# Altium PCB PCB_TLK.PcbDoc
Units mm, origin at the board's own origin, x right, y up, seen from the top; angles counter-clockwise.
Board outline 64.4 x 71.8 mm, 2 copper layers (Top Layer, Bottom Layer); 53 components, 42 nets, 284 pads, 78 vias.
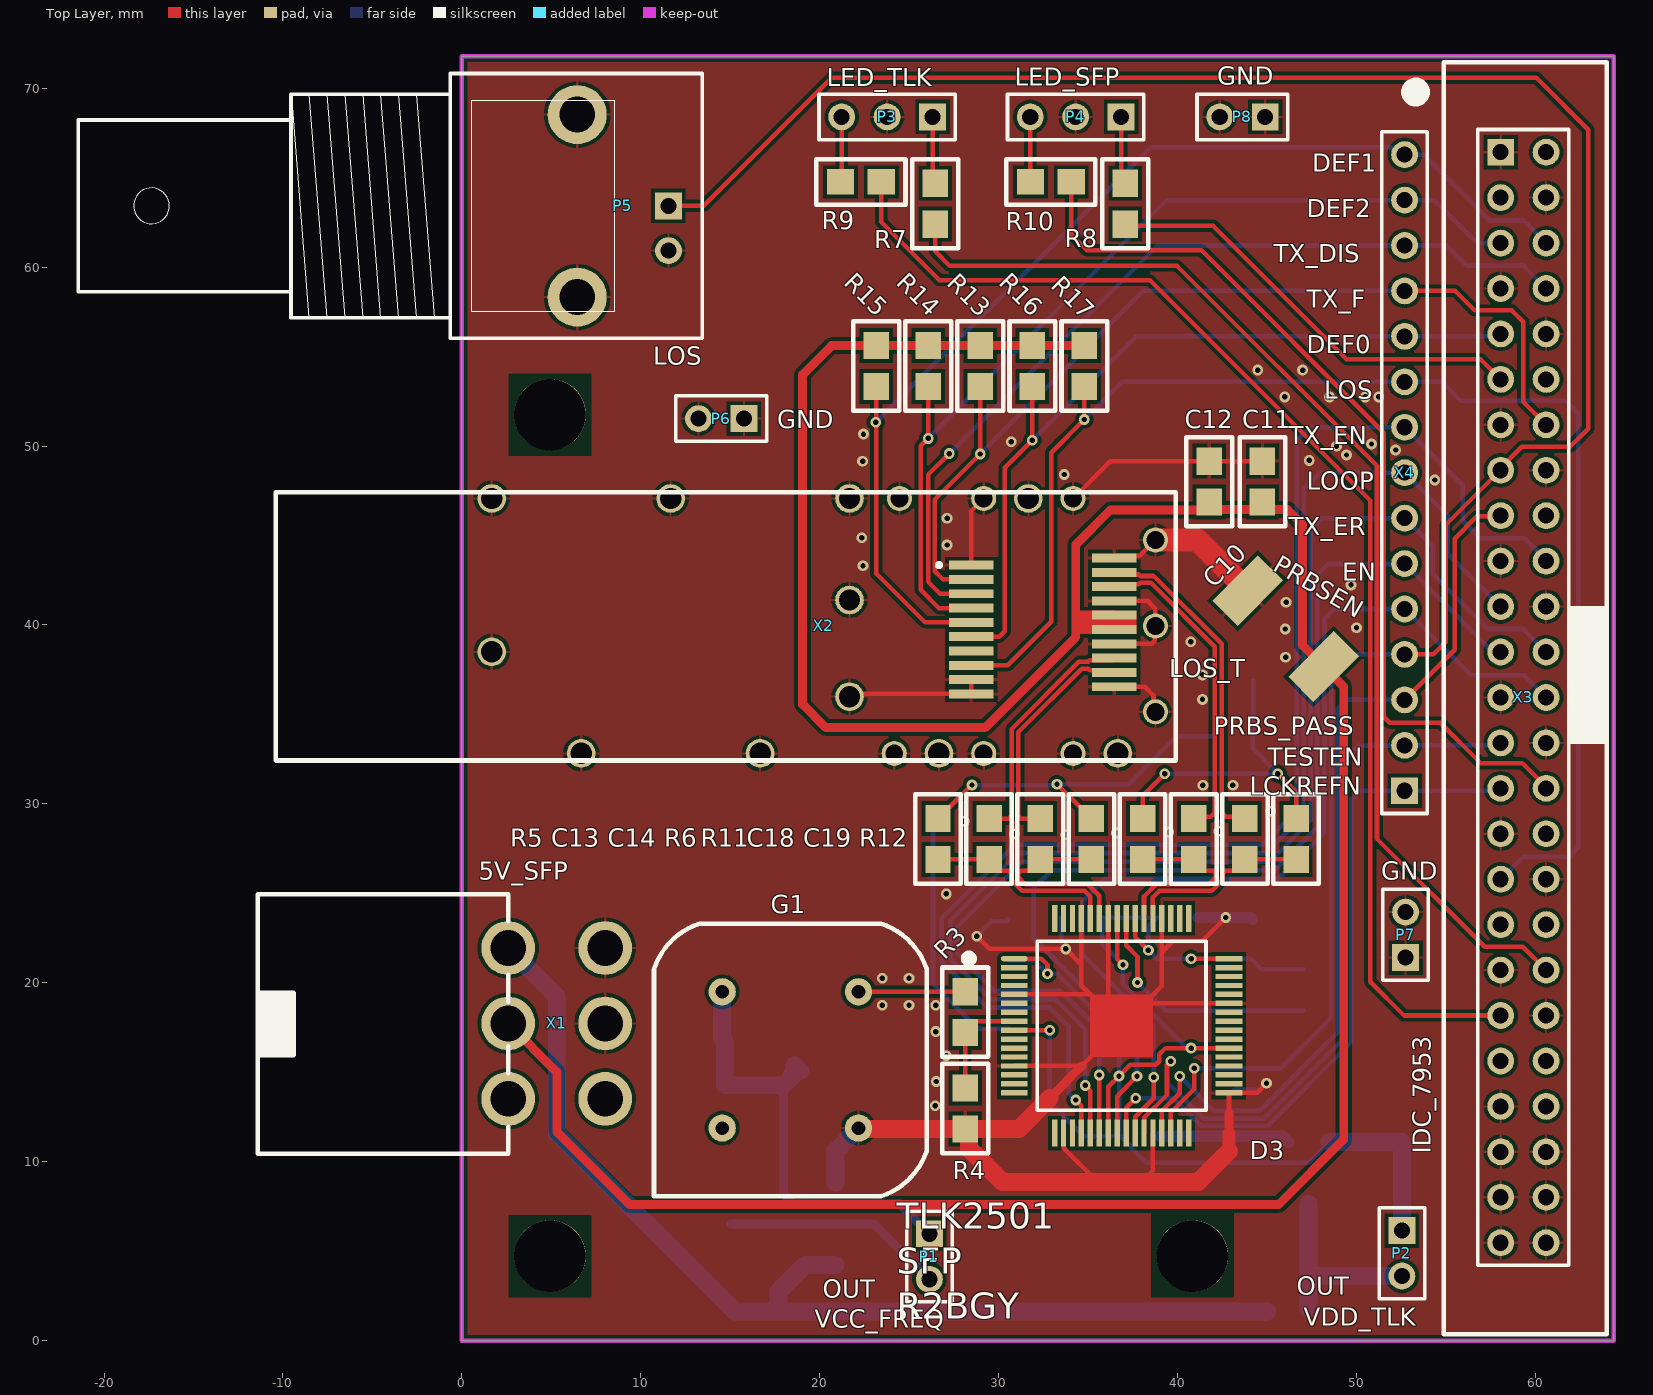
[diagram p0: Top Layer view]
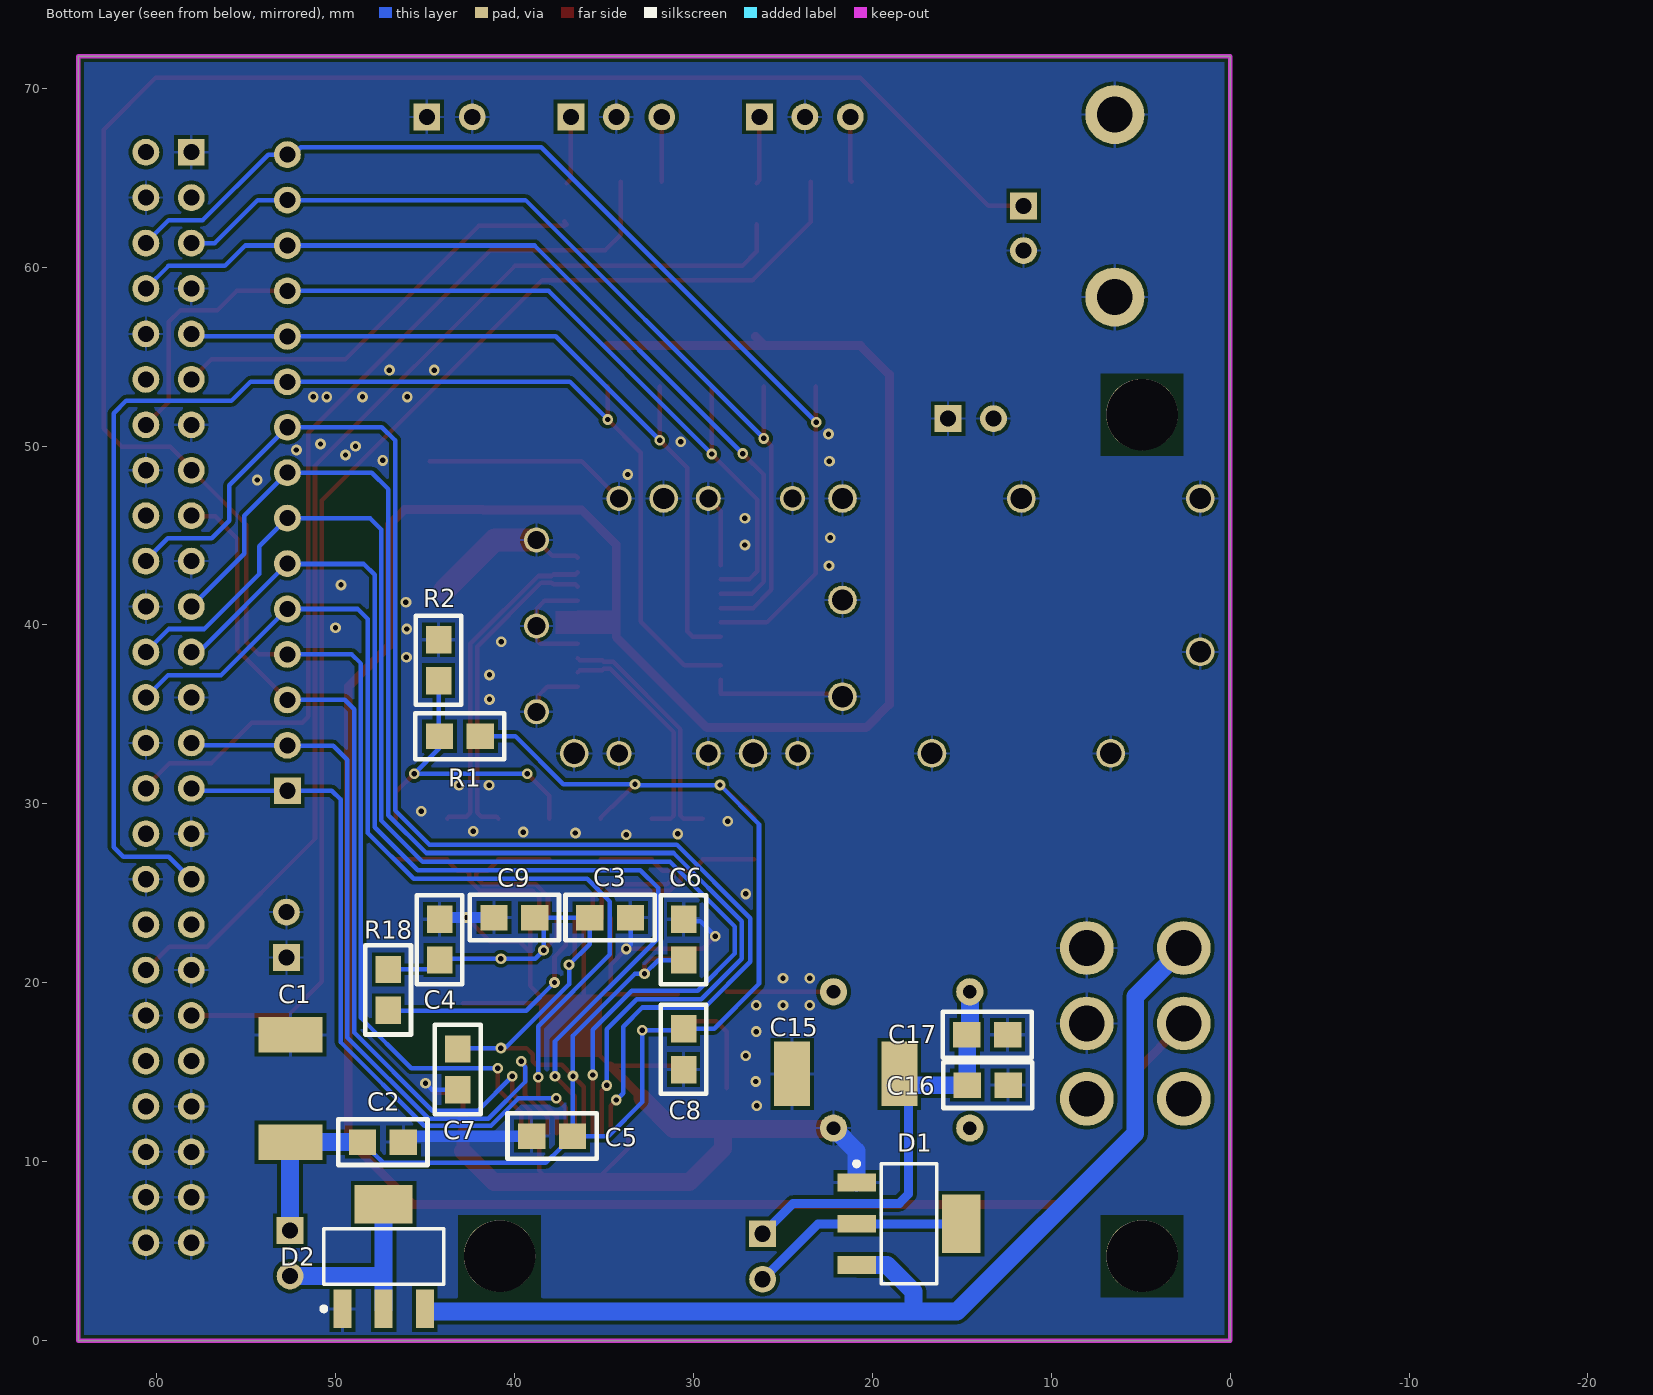
[diagram p1: Bottom Layer view, seen from below]

## Layer stack, top to bottom
Top Solder: solder mask 0.0102, Solder Resist, Dk 3.5
Top Layer: signal copper 0.0356
Dielectric 1: dielectric 0.32, FR-4, Dk 4.8
Bottom Layer: signal copper 0.0356
Bottom Solder: solder mask 0.0102, Solder Resist, Dk 3.5

## Board outline
0,0 0,71.8 64.4,71.8 64.4,0

## Design rules (kind name [scope] priority, off if disabled: settings)
BoardOutlineClearance [OnLayer('Multi-Layer')] p1: gap=0.254 ignorepadtopadclearanceinfootprint=FALSE except(0: Arc-SplitContinuation Track-SplitContinuation SMDPad-SplitContinuation THPad-SplitContinuation Via-SplitContinuation Fill-SplitContinuation Poly-SplitContinuation Region-SplitContinuation Text-SplitContinuation; 0.4: Arc-OutlineEdge Track-OutlineEdge SMDPad-OutlineEdge THPad-OutlineEdge Via-OutlineEdge Fill-OutlineEdge Poly-OutlineEdge Region-OutlineEdge Text-OutlineEdge)
Clearance [All] p1: gap=0.125 ignorepadtopadclearanceinfootprint=FALSE except(0.2: Arc-Fill Arc-Poly Track-Fill Track-Poly SMDPad-SMDPad SMDPad-Fill SMDPad-Poly THPad-Fill THPad-Poly Via-Fill Via-Poly Fill-Fill Fill-Poly Poly-Poly Poly-Region Poly-Text; 0.25: Arc-Hole Track-Hole SMDPad-Hole THPad-Hole Via-Hole Fill-Hole Poly-Hole Region-Hole Text-Hole) // Standart
DiffPairsRouting [All] p1: maxlimit=0.254 minlimit=0.127 mostfreqgap=0.13 toplayer_minwidth=0.127 toplayer_maxwidth=0.381 toplayer_prefwidth=0.37 bottomlayer_minwidth=0.127 bottomlayer_maxwidth=0.381 bottomlayer_prefwidth=0.37 maxuncoupledlength=12.7
HoleSize [All] p1: absolutevalues=TRUE maxlimit=5 minlimit=0.3 maxpercent=80.000 minpercent=20.000
MinimumSolderMaskSliver [All] p1: minsoldermaskwidth=0.1
PlaneClearance "PlaneClearance-1 1/2 Oz" [All] p1: clearance=0.2 // Standart
PlaneConnect "TermalConnect-1 1/2 Oz" [All] p1: planeconnectstyle=Relief reliefexpansion=0.2 reliefentries=4 reliefconductorwidth=0.2 reliefairgap=0.2 // Standart
PolygonConnect "PolygonConnect-1 1/2 Oz" [All] p1: thpad.connectstyle=Relief thpad.reliefconductorwidth=0.15 thpad.reliefentries=4 thpad.polygonreliefangle="90 Angle" thpad.airgapwidth=0.2 smdpad.connectstyle=Relief smdpad.reliefconductorwidth=0.2 smdpad.reliefentries=4 smdpad.polygonreliefangle="90 Angle" smdpad.airgapwidth=0.2 via.connectstyle=Direct via.reliefconductorwidth=0.254 via.reliefentries=4 via.polygonreliefangle="90 Angle" via.airgapwidth=0.254 // Standart
RoutingVias [All] p1: holewidth=0.3 width=1.27 viastyle="Through Hole" minholewidth=0.3 minwidth=0.6 maxholewidth=0.711 maxwidth=1.27
SilkToSilkClearance [All] p1: silktosilkclearance=0
SilkToSolderMaskClearance [IsPad] p1: minsilkscreentomaskgap=0 clearancetoexposedcopper=TRUE
SolderMaskExpansion [All] p1: expansion=0.102 istentingtop=FALSE
UnRoutedNet [All] p1: checkbadconnections=TRUE
Width [All] p1: maxlimit=2.5 minlimit=0.125 preferedwidth=0.37
22 further rules are at their usual default settings.

## Classes and differential pairs
component class Sheet1_TLK: C1 C2 C3 C4 C5 C6 C7 C8 C9 C10 C11 C12 C13 C14 C15 C16 C17 C18 C19 D1 D2 D3 G1 P5 P7 P8 R1 R2 R3 R4 R5 R6 R7 R8 R9 R10 R13 R14 R15 R16 R17 R18 X1 X2 X3 X4
differential pair TX: +TX_P -TX_N
differential pair TD: +TD_P -TD_N
differential pair RX: +RX_P -RX_N
differential pair RD: +RD_P -RD_N

## Components (designator, comment, footprint, x,y, rotation, side; value= is the part's Value field where it differs from the comment)
C1 "10 мкФ" Cap_BIG 54.431,9.997 r180 bottom
C2 "0,1 мкФ" CAP_SMALL 44.855,12.359 r0 bottom
C3 "0,01 мкФ" CAP_SMALL 32.156,24.917 r0 bottom
C4 "0,01 мкФ" CAP_SMALL 45.466,24.917 r270 bottom
C5 "0,01 мкФ" CAP_SMALL 40.411,10.16 r180 bottom
C6 "0,01 мкФ" CAP_SMALL 31.825,24.917 r270 bottom
C7 "0,01 мкФ" CAP_SMALL 41.91,12.649 r90 bottom
C8 "0,01 мкФ" CAP_SMALL 29.285,13.781 r90 bottom
C9 "0,01 мкФ" CAP_SMALL 42.52,22.377 r180 bottom
C10 "10 мкФ" Cap_BIG 47.6,35.56 r45 top
C11 "0,1 мкФ" CAP_SMALL 43.485,50.521 r270 top
C12 "0,01 мкФ" CAP_SMALL 40.513,50.521 r270 top
C13 "0,01 мкФ" CAP_SMALL 30.747,25.531 r90 top
C14 "0,01 мкФ" CAP_SMALL 33.606,25.531 r90 top
C15 "10 мкФ" Cap_BIG 17.399,13.005 r90 bottom
C16 "0,1 мкФ" CAP_SMALL 11.049,15.545 r0 bottom
C17 "0,01 мкФ" CAP_SMALL 11.074,18.364 r0 bottom
C18 "0,01 мкФ" CAP_SMALL 42.184,25.531 r90 top
C19 "0,01 мкФ" CAP_SMALL 45.044,25.531 r90 top
D1 "LM1117GS-3.3" LM1117_SOT223 17.958,6.528 r180 bottom
D2 "LM1117GS-2.5" LM1117_SOT223 47.32,4.699 r90 bottom
D3 "TLK2501IRCP" Quad64 30.885,21.35 r270 top
G1 "125 МГц Shoulder El." HALF 14.553,11.876 r90 top
P1 "VCC_FREQ" HDR1X2 26.137,5.969 r270 top
P2 "VDD_TLK" HDR1X2 52.553,6.147 r270 top
P3 "LED_TLK" HDR1X3 26.314,68.402 r180 top
P4 "LED_SFP" HDR1X3 36.855,68.402 r180 top
P5 "LOS" "BNC_RA CON" 11.552,63.429 r0 top
P6 "GND" HDR1X2 15.773,51.537 r180 top
P7 "GND" HDR1X2 52.756,21.412 r90 top
P8 "GND" HDR1X2 44.907,68.402 r180 top
R1 "200" RES 45.542,35.027 r270 bottom
R2 "810" RES 43.002,40.513 r0 bottom
R3 "50" RES 29.386,20.842 r180 top
R4 "4,7к" RES 29.386,15.458 r180 top
R5 "50" RES 25.373,25.556 r0 top
R6 "50" RES 36.44,30.52 r180 top
R7 "50" RES 25.222,61.07 r0 top
R8 "50" RES 35.839,61.07 r0 top
R9 "50" RES 24.79,63.525 r90 top
R10 "50" RES 35.408,63.525 r90 top
R11 "50" RES 36.81,25.556 r0 top
R12 "50" RES 47.877,30.52 r180 top
R13 "10к" RES 27.737,51.994 r0 top
R14 "10к" RES 24.828,51.994 r0 top
R15 "10к" RES 21.92,51.994 r0 top
R16 "10к" RES 30.645,51.994 r0 top
R17 "10к" RES 33.553,51.994 r0 top
R18 "200" RES 48.311,17.12 r180 bottom
X1 "5V_SFP" POWER 2.591,21.947 r90 top
X2 "SFP-20pin" SFP-20pin 28.472,43.347 r270 top
X3 "IDC_7953" IDC_7953 58.072,66.43 r270 top
X4 "Header 15" HDR1X15 52.705,30.734 r90 top

## Footprints (in the part's own frame and the unit in brackets; to place one, negate y for a bottom-side part, rotate by r counter-clockwise, add the part's x,y. Pads: shape width x height; smd on the part's side, far side on the other; paste and mask are expansions set on the pad)
"BNC_RA CON" [mm] "Connector; BNC Elbow"
  rect 1.5x1.5 hole 0.9: 1(0,0)
  round 3.3 hole 2: 2(-5.1,-5.1) 2(-5.1,5.1)
  round 1.5 hole 0.9: 2(0,-2.5)
  silkscreen extent -33,-7.4 1.9,7.4
Cap_BIG [mm] "FROM_MAX"
  rect 3.6x2 smd: 1(1.905,7.092) 2(1.905,1.092)
  body extent 0,-0.01 3.81,8.19, height 2.54
CAP_SMALL [mil] "FROM_MAX"
  rect 60x55.98 smd: 1(53.71,50) 2(143.71,50)
  silkscreen extent 1,0 197,100, body extent 20,18 178,82, height 100
HALF [mil]
  round 60 hole 30: 1(0,0) 4(0,-300) 5(300,-300) 8(300,0)
  silkscreen extent -150,-450 450,150, body extent -100,-350 396,98, height 276
HDR1X2 [mm] "Connector; Header; 2 Position"
  rect 1.5x1.5 hole 0.9: 1(0,0)
  round 1.5 hole 0.9: 2(2.54,0)
  silkscreen extent -1.27,-1.27 3.81,1.27
HDR1X3 [mm] "Connector; Header; 3 Position"
  rect 1.5x1.5 hole 0.9: 1(0,0)
  round 1.5 hole 0.9: 2(2.54,0) 3(5.08,0)
  silkscreen extent -1.27,-1.27 6.35,1.27
HDR1X15 [mm] "Connector; Header; 15 Position"
  rect 1.5x1.5 hole 0.9: 1(0,0)
  round 1.5 hole 0.9: 2(2.54,0) 3(5.08,0) 4(7.62,0) 5(10.16,0) 6(12.7,0) 7(15.24,0) 8(17.78,0) 9(20.32,0) 10(22.86,0) 11(25.4,0) 12(27.94,0) 13(30.48,0) 14(33.02,0) 15(35.56,0)
  silkscreen extent -1.27,-1.27 36.83,1.27
IDC_7953 [mm]
  rect 1.5x1.5 hole 0.9: 1(0,0)
  round 1.5 hole 0.9: 2(0,2.54) 3(2.54,0) 4(2.54,2.54) 5(5.08,0) 6(5.08,2.54) 7(7.62,0) 8(7.62,2.54) 9(10.16,0) 10(10.16,2.54) 11(12.7,0) 12(12.7,2.54) 13(15.24,0) 14(15.24,2.54) 15(17.78,0) 16(17.78,2.54) 17(20.32,0) 18(20.32,2.54) 19(22.86,0) 20(22.86,2.54) 21(25.4,0) 22(25.4,2.54) 23(27.94,0) 24(27.94,2.54) 25(30.48,0) 26(30.48,2.54) 27(33.02,0) 28(33.02,2.54) 29(35.56,0) 30(35.56,2.54) 31(38.1,0) 32(38.1,2.54) 33(40.64,0) 34(40.64,2.54) 35(43.18,0) 36(43.18,2.54) 37(45.72,0) 38(45.72,2.54) 39(48.26,0) 40(48.26,2.54) 41(50.8,0) 42(50.8,2.54) 43(53.34,0) 44(53.34,2.54) 45(55.88,0) 46(55.88,2.54) 47(58.42,0) 48(58.42,2.54) 49(60.96,0) 50(60.96,2.54)
  silkscreen extent -5.03,-5.14 66.07,5.92
LM1117_SOT223 [mm] "SOT223, 4-Leads, Body 6,50x7,00mm (avg), Pitch 2,30mm, IPC Medium Density"
  rect 2.15x1 smd: 1(-2.925,2.3) 2(-2.925,0) 3(-2.925,-2.3)
  rect 2.15x3.25 smd: 4(2.925,0)
  silkscreen extent -3.05,-3.35 1.55,3.47, body extent -1.85,-3.35 1.85,3.35, height 1.8
POWER [mm] "POWER"
  round 3 hole 2: 1(0,0) 2(-4.217,0) 3(-8.435,0) 4(-8.435,-5.422) 5(-4.217,-5.422) 6(0,-5.422)
  silkscreen extent -11.5,0 3,14
Quad64 [mm]
  oval 0.3x1.5 smd: 1(0,0)
  rect 0.3x1.5 smd: 2(0.5,0) 3(1,0) 4(1.5,0) 5(2,0) 6(2.5,0) 7(3,0) 8(3.5,0) 9(4,0) 10(4.5,0) 11(5,0) 12(5.5,0) 13(6,0) 14(6.5,0) 15(7,0) 16(7.5,0) 33(7.5,12) 34(7,12) 35(6.5,12) 36(6,12) 37(5.5,12) 38(5,12) 39(4.5,12) 40(4,12) 41(3.5,12) 42(3,12) 43(2.5,12) 44(2,12) 45(1.5,12) 46(1,12) 47(0.5,12) 48(0,12)
  rect 1.5x0.3 smd: 17(9.75,2.25) 18(9.75,2.75) 19(9.75,3.25) 20(9.75,3.75) 21(9.75,4.25) 22(9.75,4.75) 23(9.75,5.25) 24(9.75,5.75) 25(9.75,6.25) 26(9.75,6.75) 27(9.75,7.25) 28(9.75,7.75) 29(9.75,8.25) 30(9.75,8.75) 31(9.75,9.25) 32(9.75,9.75) 49(-2.25,9.75) 50(-2.25,9.25) 51(-2.25,8.75) 52(-2.25,8.25) 53(-2.25,7.75) 54(-2.25,7.25) 55(-2.25,6.75) 56(-2.25,6.25) 57(-2.25,5.75) 58(-2.25,5.25) 59(-2.25,4.75) 60(-2.25,4.25) 61(-2.25,3.75) 62(-2.25,3.25) 63(-2.25,2.75) 64(-2.25,2.25)
  silkscreen extent -0.97,-2.74 8.46,10.71, body extent -0.96,1.29 8.46,10.71, height 1
RES [mil] "FROM_MAX"
  rect 55.98x60 smd: 1(49,52.71) 2(49,142.71)
  silkscreen extent -1,0 99,196, body extent 17,19 81,177, height 100
SFP-20pin [mm] "SFP-20pin"
  rect 0.5x2.5 smd: 1(0,0) 2(0.8,0) 3(1.6,0) 4(2.4,0) 5(3.2,0) 6(4,0) 7(4.8,0) 8(5.6,0) 9(6.4,0) 10(7.2,0) 11(6.8,8) 12(6,8) 13(5.2,8) 14(4.4,8) 15(3.6,8) 16(2.8,8) 17(2,8) 18(1.2,8) 19(0.4,8) 20(-0.4,8)
  round 1.6 hole 1.2: h(-3.725,3.2) h(-3.725,-6.8) h(-3.725,-16.8) h(-3.725,-26.8) h(1.95,-6.8) h(4.85,-26.8) h(7.35,-6.8) h(10.525,8.2) h(10.525,-1.8) h(10.525,-11.8) h(10.525,-21.8)
  round 1.4 hole 1: h(-3.725,5.7) h(-3.725,0.7) h(-3.725,-4) h(-1.4,10.3) h(3.4,10.3) h(8.2,10.3) h(10.525,5.7) h(10.525,0.7) h(10.525,-4.3)
  silkscreen extent -4.06,-38.86 10.92,11.43, body extent -4.1,-38.86 10.9,7.8, height 9

## Part data
C1 C10 C15: library part CAP_BIG
C2 C3 C4 C5 C6 C7 C8 C9 C11 C12 C13 C14 C16 C17 C18 C19: library part CAP_SMALL
D1: "Стабилизатор напряжения 3,3В"
D2: "Стабилизатор напряжения 2,5В"
P1 P2 P6 P7 P8: library part "Header 2", "Header, 2-Pin", LatestRevisionDate=17-Jul-2002, LatestRevisionNote="Re-released for DXP Platform.", Publisher="Altium Limited"
P3 P4: library part "Header 3", "Header, 3-Pin", LatestRevisionDate=17-Jul-2002, LatestRevisionNote="Re-released for DXP Platform.", Publisher="Altium Limited"
P5: library part BNC, "BNC Elbow Connector", LatestRevisionDate=17-Jul-2002, LatestRevisionNote="Re-released for DXP Platform.", Publisher="Altium Limited"
R1 R2 R3 R4 R5 R6 R7 R8 R9 R10 R11 R12 R13 R14 R15 R16 R17 R18: library part RES
X1: library part POWER
X4: "Header, 15-Pin", LatestRevisionDate=17-Jul-2002, LatestRevisionNote="Re-released for DXP Platform.", Publisher="Altium Limited"

## Free pads (board coordinates)
  round 4 hole 4 unplated: 2(4.928,4.724) 2(4.928,51.765) 2(40.843,4.724)

## Via types
v1: diameter 0.6, hole 0.3, Top Layer to Bottom Layer, 78 vias

## Nets (pads, with @x,y where several pads share a name; then routed paths per layer and width w, separated by ;. In a path a pad name is that pad's centre, name@x,y a point inside that pad or via, vN(x,y) a via of type N, cw(c..) or ccw(c..) an arc to the next point about the centre after c; other vN are vias at no path point)
5В: D1.3 D2.3 X1.1 | length 60.2
  Bottom Layer w1: X1.1 5.309,19.229 5.309,11.582 15.265,1.626 17.704,1.626 ; D1.3 19.188,4.228 17.704,2.743 17.704,1.626 ; D2.3@45.02,1.626 17.704,1.626
CLK: D3.8 R3.2 R4.1 | length 6.1
  Top Layer w0.254: R4.1 R3.2 28.142,17.266 28.726,17.85 D3.8
DEF0: R16.1 X2.6 X3.9 X4.11 | length 44.9
  Top Layer w0.254: X2.6 30.05,39.347 30.353,39.649 30.353,48.793 v1(31.89,50.33) R16.1
  Bottom Layer w0.254: v1(31.89,50.33) 37.694,56.134 X4.11 X3.9@58.072,56.134
DEF1: R15.1 X2.5 X3.6 X4.15 | length 62.9
  Top Layer w0.254: R15.1 23.165,42.875 25.893,40.147 X2.5
  Bottom Layer w0.254: v1(23.139,51.333) 38.506,66.7 51.961,66.7 52.368,66.294 53.772,66.294 57.429,62.636 59.326,62.636 X3.6
DEF2: R14.1 X2.4 X3.5 X4.14 | length 53.3
  Top Layer w0.254: R14.1 v1(26.073,50.432) 25.654,50.013 25.654,41.961 26.668,40.947 X2.4
  Bottom Layer w0.254: v1(26.073,50.432) 39.395,63.754 54.356,63.754 56.76,61.35 X3.5
ENABLE: D3.24 X3.23 X4.6 | length 60.4
  Top Layer w0.254: D3.24 36.635,13.664 v1(37.743,14.772)
  Bottom Layer w0.254: v1(37.743,14.772) 37.743,16.728 31.979,22.492 31.979,25.298 32.969,26.289 45.415,26.289 47.828,28.702 47.828,42.799 48.438,43.409 X4.6@52.705,43.409 ; X4.6 57.411,38.728 57.834,38.728 X3.23
GND: C1.1 C2.1 C3.1 C4.1 C5.1 C6.1 C7.1 C8.1 C9.1 C10.1 C11.1 C12.1 C15.1 C16.1 C17.1 D1.1 D2.1 D3.5 D3.13 D3.18 D3.28 D3.33 D3.43 D3.52 D3.58 D3.61 G1.4 P3.2 P4.2 P5.2 P6.1 P6.2 P7.1 P7.2 P8.1 P8.2 R2.1 R4.2 X1.5 X1.6 X2.1 X2.9 X2.10 X2.11 X2.14 X2.17 X2.20 X2.h X3.1 X3.4 X3.7 X3.10 X3.13 X3.16 X3.19 X3.22 X3.25 X3.28 X3.31 X3.34 X3.37 X3.40 X3.43 X3.45 X3.46 X3.47 X3.48 X3.49 X3.50 | length 152.4
  Top Layer w0.254: X2.h@21.672,35.997 21.822,36.147 X2.10 X2.9 ; G1.4 28.098,11.876 R4.2 ; X2.1 28.472,46.372 X2.h@29.172,47.072 ; v1(28.778,22.606) 29.489,21.895 v1(33.757,21.895) 34.635,21.017 ; D3.13 34.664,15.35 35.254,15.94 35.254,15.971 35.375,16.093 35.406,16.093 ; D3.5 35.12,19.35 ; D3.18 33.658,11.577 33.658,10.754 35.547,8.865 ; X2.h@34.172,47.072 36.256,49.156 C12.1 C11.1 ; D3.61 34.635,21.017 ; 36.016,18.455 35.254,19.217 35.12,19.35 ; D3.58 36.135,18.513 36.27,18.379 ; X2.11 38.18,36.547 38.666,36.061 38.666,35.253 X2.h@38.772,35.147 ; X2.14 38.566,38.947 38.735,39.116 38.735,39.91 38.772,39.947 38.772,40.908 38.333,41.347 X2.17 ; X2.20 36.587,43.862 37.887,43.862 X2.h@38.772,44.747 ; 37.794,18.81 37.794,18.785 37.859,18.85 D3.43 ; 37.997,8.865 38.635,9.503 D3.28 ; 38.352,19.039 38.352,19.07 38.5,19.217 38.53,19.217 39.135,19.821 39.135,21.711 ; D3.52 39.135,21.711 ; v1(42.697,23.647) 41.377,22.327 39.75,22.327 39.135,21.711 ; 42.885,12.704 D3.33 44.457,13.85 v1(44.983,14.376) ; 34.635,21.017 34.635,19.836 35.12,19.35
  Top Layer w0.5: 32.866,13.553 34.664,15.35 ; 42.885,11.557 42.885,12.704
  Top Layer w0.75: 42.885,10.582 42.885,11.557
  Top Layer w1: G1.4 22.216,11.833 R4.2 ; 32.866,13.553 31.146,11.833 R4.2 ; 42.885,10.582 41.167,8.865 37.997,8.865 35.547,8.865 30.226,8.865 28.353,10.738 28.353,11.622 R4.2
  Top Layer w1.27: X2.h@38.772,44.747 41.107,44.747 C10.1
  Bottom Layer w0.254: v1(28.778,22.606) 29.611,23.439 30.441,23.439 C6.1 ; C3.1 33.521,22.131 v1(33.757,21.895) ; C7.1 44.62,14.013 v1(44.983,14.376)
  Bottom Layer w0.635: C5.1 45.878,11.43 C2.1 ; C9.1 v1(42.697,23.647) 44.102,23.647 C4.1
  Bottom Layer w1: D1.1 20.883,10.586 G1.4
  other v1: 26.467,13.132 26.518,14.478 27.076,15.926 26.492,17.272 23.5,18.75 25,18.75 26.5,18.75 23.5,20.25 25,20.25 27.076,24.968 33.757,28.27 30.886,28.321 36.601,28.372 39.522,28.423 42.316,28.473 28.092,29.032 45.212,29.591 41.427,31.039 43.104,31.039 41.402,35.839 41.402,37.211 46.05,38.202 40.742,39.065 46.025,39.776 50.013,39.853 46.076,41.275 49.708,42.24 22.428,43.307 27.127,44.475 22.352,44.882 27.127,45.974 54.381,48.108 33.68,48.412 22.403,49.149 47.371,49.2 49.454,49.505 52.197,49.784 48.895,49.987 50.851,50.114 30.709,50.241 22.454,50.673 46,52.75 48.5,52.75 50.5,52.75 51.25,52.75 44.5,54.25 47,54.25
GREEN_SFP: P4.1 R8.2 | length 3.8
  Top Layer w0.254: P4.1 36.855,64.924 R8.2
GREEN_TLK: P3.1 R7.2 | length 3.8
  Top Layer w0.254: P3.1 26.314,64.847 R7.2
LCKREFN: D3.25 X3.29 X4.1 | length 38.8
  Top Layer w0.254: D3.25 37.135,13.021 v1(37.667,13.553)
  Bottom Layer w0.254: v1(37.667,13.553) 39.785,13.553 41.321,12.016 45.062,12.016 49.731,16.686 49.731,30.251 50.214,30.734 X3.29@57.954,30.734
LOOPEN: D3.21 X3.21 X4.8 | length 73.4
  Top Layer w0.254: v1(34.847,14.264) 35.135,13.976 D3.21
  Bottom Layer w0.254: v1(34.847,14.264) 34.847,17.401 33.172,19.075 29.566,19.075 27.305,21.336 27.305,23.444 31.115,27.254 44.948,27.254 47.066,29.372 47.066,47.6 47.981,48.514 X4.8 55.118,46.101 55.118,43.984 X3.21
LOS: R17.1 X2.8 X3.33 X4.10 | length 77.9
  Top Layer w0.254: X2.8 30.508,37.747 32.944,40.183 32.944,49.632 v1(34.798,51.486) R17.1
  Bottom Layer w0.254: v1(34.798,51.486) 36.906,53.594 X4.10 54.762,53.594 55.829,52.527 61.722,52.527 62.408,51.841 62.408,27.584 61.874,27.051 59.333,27.051 X3.33
LOS_TLK: D3.30 P5.1 X3.15 X4.4 | length 128.8
  Top Layer w0.254: P5.1 13.518,63.429 20.676,70.587 60.071,70.587 62.967,67.691 62.967,50.978 61.951,49.962 59.258,49.962 X3.15@58.009,48.713 ; D3.30 39.635,12.752 40.943,14.061 v1(40.943,15.229) ; X4.4 54.305,38.354 54.991,39.04 54.991,45.593 X3.15@58.06,48.662
  Bottom Layer w0.254: v1(40.943,15.229) 45.785,15.229 48.59,18.034 48.59,37.846 49.098,38.354 X4.4
NetD1_2: D1.2 D1.4 P1.2 | length 12.4
  Bottom Layer w0.5: D1.4 D1.2 23.038,6.528 P1.2
NetD2_2: D2.2 D2.4 P2.2 | length 11.1
  Bottom Layer w1: D2.2 47.32,3.581 ; D2.4 47.32,3.581 ; P2.2 47.346,3.607 47.32,3.581
NetD3_56: D3.56 R18.1 | length 13.8
  Top Layer w0.254: D3.56 37.135,22.098 37.77,21.463 v1(37.77,20.015)
  Bottom Layer w0.254: v1(37.77,20.015) 39.352,18.433 47.041,18.433 R18.1
NetG1_5: G1.5 R3.1 | length 6
  Top Layer w0.254: G1.5 22.18,19.504 R3.1
NetP3_3: P3.3 R9.2 | length 3.7
  Top Layer w0.254: R9.2 21.234,64.839 P3.3
NetP4_3: P4.3 R10.2 | length 3.6
  Top Layer w0.254: P4.3 31.775,64.777 R10.2
PRBS_PASS: D3.29 X3.17 X4.3 | length 50.3
  Top Layer w0.254: D3.29 39.135,12.836 40.13,13.832 v1(40.13,14.772) ; X4.3 55.499,38.608 55.499,44.831 56.744,46.076 X3.17@58.072,46.076
  Bottom Layer w0.254: v1(40.13,14.772) 42.05,12.852 44.602,12.852 48.971,17.221 48.971,35.281 49.505,35.814 X4.3
PRBSEN: D3.26 X3.26 X4.5 | length 56.8
  Top Layer w0.254: D3.26 37.648,11.614 37.648,12.518 38.683,13.553 v1(38.683,14.721)
  Bottom Layer w0.254: v1(38.683,14.721) 38.683,17.578 34.671,21.59 34.671,24.536 35.941,25.806 45.644,25.806 48.209,28.372 48.209,40.335 48.768,40.894 X4.5 56.413,37.186 59.376,37.186 X3.26
RD_N: C14.2 X2.12 | length 12.9
  Top Layer w0.254: C14.2 31.262,29.181 31.113,29.33 31.113,34.015 34.653,37.555 35.025,37.555 35.11,37.47 36.349,37.47 X2.12
RD_P: C13.2 X2.13 | length 13.5
  Top Layer w0.254: C13.2 30.581,29.181 30.729,29.33 30.729,34.174 34.494,37.939 35.025,37.939 35.11,38.024 36.349,38.024 X2.13
RX_N: C19.1 D3.53 R12.2 | length 10.3
  Top Layer w0.254: D3.53 38.635,24.782 38.984,25.132 41.926,25.132 42.536,25.742 42.536,26.111 42.685,26.26 43.189,26.26 43.774,26.844 C19.1 R12.2
RX_P: C18.1 D3.54 R11.1 | length 10.3
  Top Layer w0.254: R11.1 C18.1 40.914,26.844 41.498,26.26 42.003,26.26 42.152,26.111 42.152,25.901 41.767,25.516 38.825,25.516 38.135,24.825 D3.54
SFP_ERR: R10.1 X3.30 | length 51.6
  Top Layer w0.254: R10.1 34.069,61.816 34.925,60.96 41.326,60.96 51.537,50.749 51.537,34.874 51.867,34.544 54.686,34.544 56.947,32.283 59.284,32.283 X3.30@60.655,30.913
SFP_OK: R8.1 X3.11 | length 24.8
  Top Layer w0.254: R8.1@37.235,62.56 R8.1 37.187,62.306 42.012,62.306 49.454,54.864 56.947,54.864 X3.11@58.076,53.734
TD_N: C19.2 X2.19 | length 18.5
  Top Layer w0.254: X2.19 36.595,42.824 37.834,42.824 37.919,42.739 38.681,42.739 42.47,38.95 42.47,29.504 42.699,29.275 43.679,29.275 C19.2
TD_P: C18.2 X2.18 | length 17.8
  Top Layer w0.254: X2.18 36.595,42.27 37.834,42.27 37.919,42.355 38.522,42.355 42.086,38.791 42.086,29.504 41.857,29.275 41.008,29.275 C18.2
TESTEN: D3.27 X3.27 X4.2 | length 43
  Top Layer w0.254: D3.27 38.158,11.623 38.158,12.469 39.419,13.73 39.419,15.407 v1(39.622,15.61)
  Bottom Layer w0.254: v1(39.622,15.61) 39.622,15.516 39.395,15.289 39.395,14.478 41.478,12.395 44.806,12.395 49.352,16.942 49.352,32.461 50.14,33.249 X4.2@52.705,33.249 ; X4.2 X3.27@57.936,33.274
TLK_ERR: R9.1 X3.39 | length 71.4
  Top Layer w0.254: R9.1 23.452,62.527 26.695,59.284 38.456,59.284 50.779,46.961 50.779,20.062 52.671,18.17 X3.39@58.47,18.17
TLK_OK: R7.1 X3.38 | length 64.7
  Top Layer w0.254: R7.1 26.467,60.884 27.28,60.071 39.98,60.071 51.158,48.893 51.158,28.04 57.175,22.022 59.3,22.022 X3.38@60.72,20.602
TX_DIS: X2.3 X3.8 X4.13 | length 49.5
  Top Layer w0.254: v1(27.254,49.581) 26.062,48.389 26.062,42.416 26.732,41.747 X2.3
  Bottom Layer w0.254: v1(27.254,49.581) 38.887,61.214 55.067,61.214 56.21,60.071 59.351,60.071 X3.8
TX_EN: D3.20 X3.20 X4.9 | length 78.8
  Top Layer w0.254: v1(34.314,13.451) 34.635,13.13 D3.20
  Bottom Layer w0.254: v1(34.314,13.451) 33.934,13.83 33.934,17.551 32.868,18.618 29.376,18.618 26.822,21.172 26.822,23.608 30.926,27.711 44.759,27.711 46.685,29.638 46.685,50.317 47.422,51.054 X4.9 55.956,47.803 55.956,45.822 56.921,44.856 59.385,44.856 X3.20@60.642,43.6
TX_ER: D3.22 X3.24 X4.7 | length 72.9
  Top Layer w0.254: D3.22 v1(35.635,14.848)
  Bottom Layer w0.254: v1(35.635,14.848) 35.635,17.375 33.452,19.558 29.765,19.558 27.686,21.637 27.686,23.143 31.315,26.772 45.148,26.772 47.447,29.071 47.447,45.339 48.082,45.974 X4.7 54.28,44.399 54.28,42.85 57.353,39.776 59.326,39.776 X3.24
TX_FAULT: R13.1 X2.2 X3.14 X4.12 | length 54.7
  Top Layer w0.254: X2.2 26.897,42.547 26.441,43.002 26.441,47.015 v1(28.981,49.555) R13.1 ; X4.12 55.524,58.674 56.617,57.582 58.699,57.582 59.334,56.947 59.334,52.468 X3.14
  Bottom Layer w0.254: v1(28.981,49.555) 38.1,58.674 X4.12
TX_N: C14.1 D3.59 R6.2 | length 10.9
  Top Layer w0.254: R6.2 C14.1 32.336,26.844 31.752,26.26 31.247,26.26 31.099,26.111 31.099,25.901 31.483,25.516 34.984,25.516 35.635,24.865 D3.59
TX_P: C13.1 D3.60 R5.1 | length 10.8
  Top Layer w0.254: R5.1 C13.1 29.477,26.844 30.061,26.26 30.566,26.26 30.715,26.111 30.715,25.742 31.324,25.132 34.825,25.132 35.135,24.822 D3.60
VCC_FREQ: C15.2 C16.2 C17.2 G1.8 P1.1 | length 25
  Bottom Layer w0.5: C15.2@17.991,14.275 17.983,14.267 17.983,8.179 18.491,7.671 24.435,7.671 P1.1
  Bottom Layer w1: G1.8 14.553,16.9 14.699,16.753 C16.2 17.991,14.275 18.491,14.775 C15.2 ; C15.2@18.6,15.378 C15.2@18.92,15.059
VCC_SFP: C10.2 C11.2 C12.2 R13.2 R14.2 R15.2 R16.2 R17.2 X1.2 X2.15 X2.16 | length 166.8
  Top Layer w0.5: X1.2 5.309,15.011 5.309,11.684 9.398,7.595 45.653,7.595 49.301,11.243 49.301,36.552 C10.2 47,38.854 47,45.608 46.155,46.453 41.807,46.453 41.781,46.428 36.252,46.428 34.32,44.496 34.32,40.547 ; R14.2@26.073,55.624 26.073,55.67 R14.2@26.534,56.131 ; R17.2 R13.2 R14.2 R15.2 20.668,55.619 19.05,54 19.05,35.56 20.345,34.265 29.261,34.265 34.32,39.324 34.32,40.547 ; X2.15 35.12,39.747 34.32,40.547 ; X2.16 34.32,40.547
VDD_TLK: C1.2 C2.2 C3.2 C4.2 C5.2 C6.2 C7.2 C8.2 C9.2 D3.1 D3.9 D3.23 D3.38 D3.48 D3.55 D3.57 P2.1 R1.2 R5.2 R6.1 R18.2 | length 131.8
  Top Layer w0.254: R5.2 26.618,29.232 27.202,29.816 27.253,29.816 28.49,31.053 v1(28.523,31.053) ; D3.9 v1(32.866,17.35) ; D3.1 32.396,21.35 32.741,21.006 v1(32.741,20.498) ; v1(33.272,31.104) 34.561,29.816 34.612,29.816 35.196,29.232 R6.1 ; D3.23 36.135,14.18 v1(36.739,14.784) 37.373,15.418 38.786,15.418 38.989,15.621 38.989,16.002 39.337,16.35 v1(40.765,16.35) D3.38 ; D3.57 36.635,21.328 v1(36.957,21.006) ; D3.55 37.635,22.563 v1(38.379,21.819) ; v1(40.765,21.35) D3.48
  Bottom Layer w0.254: C6.2 31.971,21.267 v1(32.741,20.498) 33.274,20.498 36.739,17.032 v1(36.739,14.784) 36.761,14.763 C5.2 ; R1.2 39.954,33.782 37.276,31.104 v1(33.272,31.104) 33.222,31.053 v1(28.523,31.053) 26.34,28.87 26.34,19.939 28.847,17.431 C8.2 30.636,17.35 v1(32.866,17.35) 32.866,13.337 34.773,11.43 C5.2 ; C7.2 43.129,16.35 v1(40.765,16.35) 40.699,16.417 40.454,16.417 36.957,19.914 v1(36.957,21.006) 35.807,22.156 C3.2 C9.2 38.379,23.157 v1(38.379,21.819) 38.848,21.35 v1(40.765,21.35) 44.113,21.35 C4.2 44.719,20.744 R18.2 ; C2.2 48.454,11.089 47.87,10.505 47.87,10.454 47.348,9.931 38.26,9.931 37.396,10.795 37.396,10.846 36.812,11.43 C5.2
  Bottom Layer w1: C2.2 C1.2 52.553,11.062 P2.1
Vt: R1.1 R2.2 R11.2 R12.1 | length 18.1
  Top Layer w0.254: R11.2 38.055,30.451 v1(39.292,31.688) ; v1(45.617,31.688) 46.633,30.672 R12.1
  Bottom Layer w0.254: v1(39.292,31.688) v1(45.617,31.688) 44.203,33.102 R1.1 44.247,33.825 R2.2
pads on no net: D3.2 D3.3 D3.4 D3.6 D3.7 D3.10 D3.11 D3.12 D3.14 D3.15 D3.16 D3.17 D3.19 D3.31 D3.32 D3.34 D3.35 D3.36 D3.37 D3.39 D3.40 D3.41 D3.42 D3.44 D3.45 D3.46 D3.47 D3.49 D3.50 D3.51 D3.62 D3.63 D3.64 G1.1 X1.3 X1.4 X2.7 X3.2 X3.3 X3.12 X3.18 X3.32 X3.35 X3.36 X3.41 X3.42 X3.44

## Polygon pours and split planes (outlines as drawn)
GND on Bottom Layer "Top Overlay-No Net" (solid, remove dead copper, pour order 0): 0,0 0,71.8 64.4,71.8 64.4,0
GND on Top Layer "Top Overlay-No Net" (solid, remove dead copper, pour order 1): 0,71.8 0,0 64.4,0 64.4,71.8

## Keep-outs
Keep-Out Layer:
  the board outline again, w0.254

## Other copper
Top Layer:
  rectangle net VCC_SFP: 34.087,39.497 37.719,40.792
  rectangle net GND: 35.127,15.844 38.627,19.344
Multi-Layer:
  pour cut-out: 38.532,2.413 38.532,7.01 43.155,7.01 43.155,2.413
  pour cut-out: 2.616,49.454 2.616,54.051 7.239,54.051 7.239,49.454
  pour cut-out: 2.616,2.413 2.616,7.01 7.239,7.01 7.239,2.413

## Silkscreen, mask and mechanical layers (free items; w line width, h text height)
Top Overlay:
  text "DEF1" at 47.552,65.346 h1
  text "DEF2" at 47.219,62.806 h1
  text "TX_DIS" at 45.386,60.266 h1
  text "TX_F" at 47.219,57.726 h1
  text "DEF0" at 47.219,55.186 h1
  text "LOS" at 48.219,52.646 h1
  text "TX_EN" at 46.219,50.106 h1
  text "LOOP" at 47.219,47.566 h1
  text "TX_ER" at 46.219,45.026 h1
  text "PRBSEN" at 45.279,43.088 h1 r330
  text "EN" at 49.218,42.486 h1
  text "LOS_T" at 39.554,37.076 h1
  text "PRBS_PASS" at 42.042,33.875 h1
  text "TESTEN" at 45.041,32.144 h1
  text "LCKREFN" at 44.041,30.497 h1
  text "OUT" at 46.682,2.557 h1
  text "OUT" at 20.164,2.405 h1
  text "TLK2501 / SFP / R2BGY" at 24.308,0.708 h2.52
Top Solder:
  rectangle: 34.949,15.686 38.759,19.522